# Altium PCB TYPE-C-TH_16PLC-H10.0.pcbdoc
Units mm, origin at the board's own origin, x right, y up, seen from the top; angles counter-clockwise.
Board outline 22.26 x 18.01 mm, 2 copper layers (Top Layer, Bottom Layer); 1 components, 0 nets, 20 pads, 0 vias.
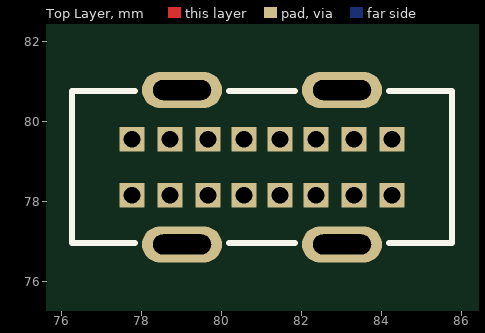
[diagram p0: Top Layer view]
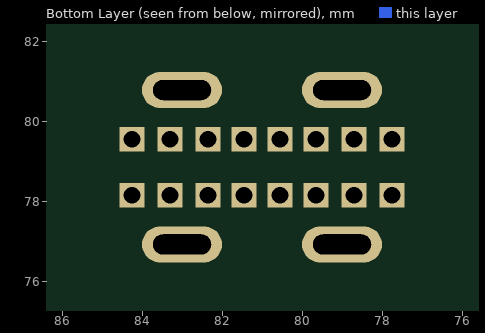
[diagram p1: Bottom Layer view, seen from below]

## Layer stack, top to bottom
Top Layer: signal copper (thickness not stored)
Dielectric: dielectric 0.32, FR-4, Dk 4.8
Bottom Layer: signal copper (thickness not stored)

## Board outline
92.11,69.85 69.85,69.85 69.85,87.86 92.11,87.86

## Components (designator, comment, footprint, x,y, rotation, side; value= is the part's Value field where it differs from the comment)
? "TYPE-C-TH_16PLC-H10.0" TYPE-C-TH_16PLC-H10.0 81.01,78.855 r0 top

## Footprints (in the part's own frame and the unit in brackets; to place one, negate y for a bottom-side part, rotate by r counter-clockwise, add the part's x,y. Pads: shape width x height; smd on the part's side, far side on the other; paste and mask are expansions set on the pad)
TYPE-C-TH_16PLC-H10.0 [mm]
  rect 0.62x0.62 hole 0.42: A1(-3.25,0.7) A4(-2.3,0.7) A5(-1.35,0.7) A6(-0.45,0.7) A7(0.45,0.7) A8(1.35,0.7) A9(2.3,0.7) A12(3.25,0.7) B1(3.25,-0.7) B4(2.3,-0.7) B5(1.35,-0.7) B6(0.45,-0.7) B7(-0.45,-0.7) B8(-1.35,-0.7) B9(-2.3,-0.7) B12(-3.25,-0.7)
  oval 2x0.9 hole 0.5 slot 1.45 at 0 deg: A2(-2,1.93) A10(2,1.93) B2(2,-1.93) B10(-2,-1.93)
  silkscreen extent -4.75,-1.9 4.75,1.9

## Nets (pads, with @x,y where several pads share a name; then routed paths per layer and width w, separated by ;. In a path a pad name is that pad's centre, name@x,y a point inside that pad or via, vN(x,y) a via of type N, cw(c..) or ccw(c..) an arc to the next point about the centre after c; other vN are vias at no path point)
pads on no net: ?.A1 ?.A2 ?.A4 ?.A5 ?.A6 ?.A7 ?.A8 ?.A9 ?.A10 ?.A12 ?.B1 ?.B2 ?.B4 ?.B5 ?.B6 ?.B7 ?.B8 ?.B9 ?.B10 ?.B12